# Altium PCB AIO_BLUE_TO_IDC.PcbDoc
Units mm, origin at the board's own origin, x right, y up, seen from the top; angles counter-clockwise.
Board outline 82 x 38 mm, 2 copper layers (Top Layer, Bottom Layer); 2 components, 41 nets, 124 pads, 0 vias.
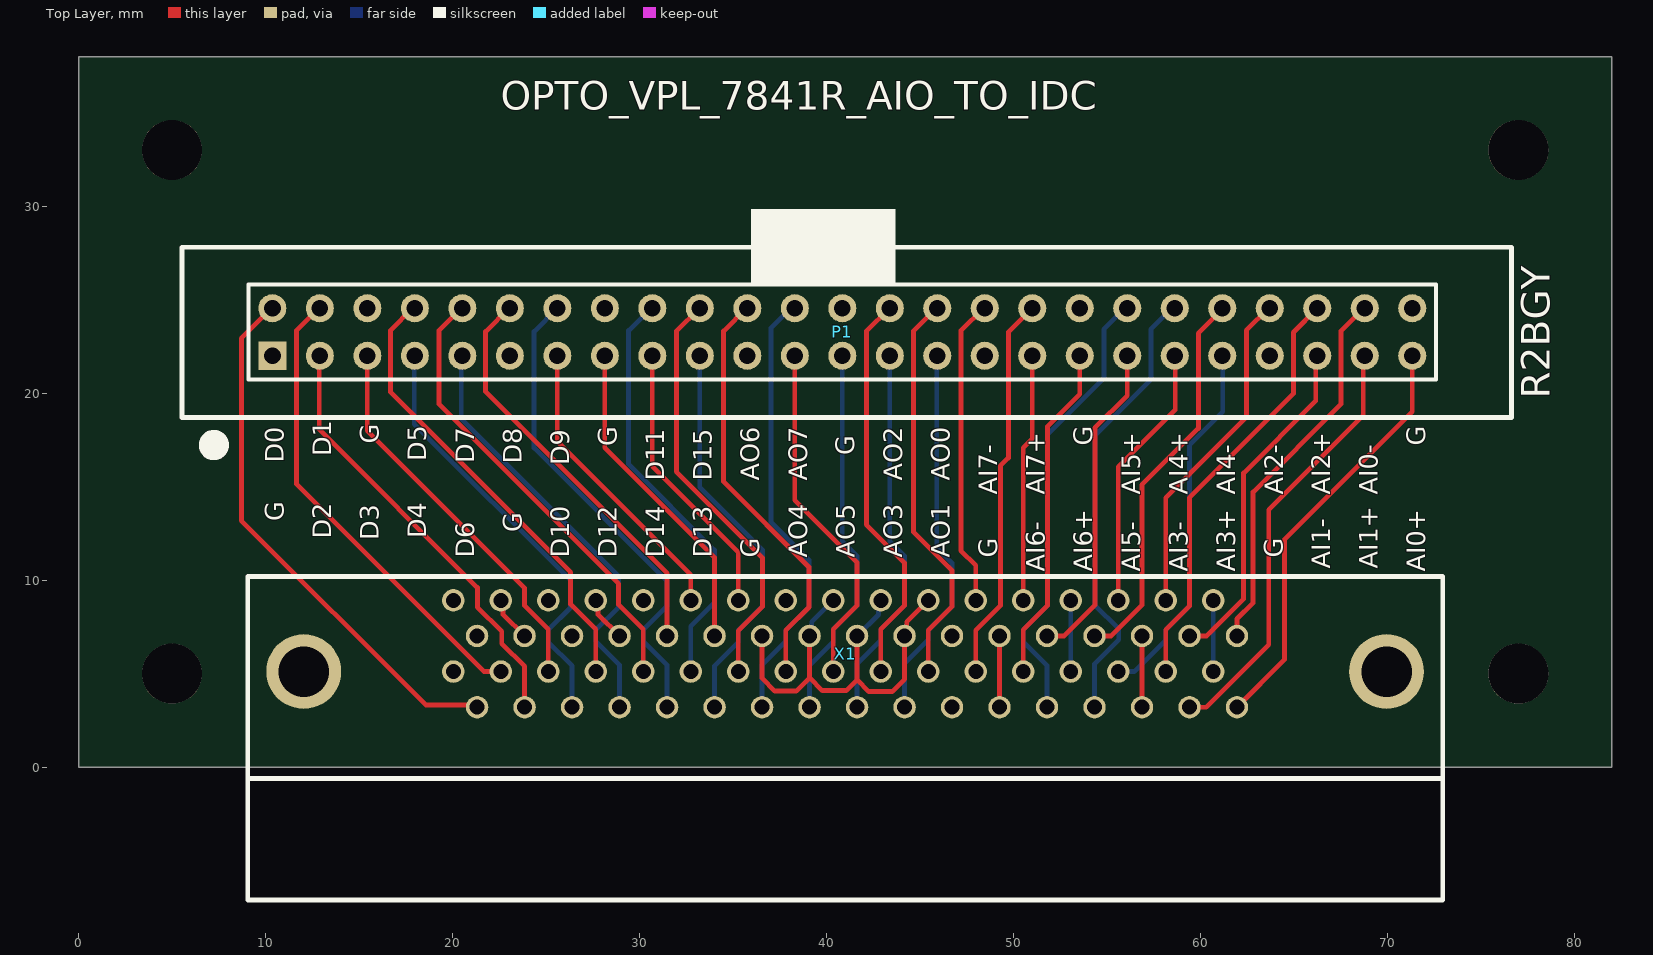
[diagram p0: Top Layer view]
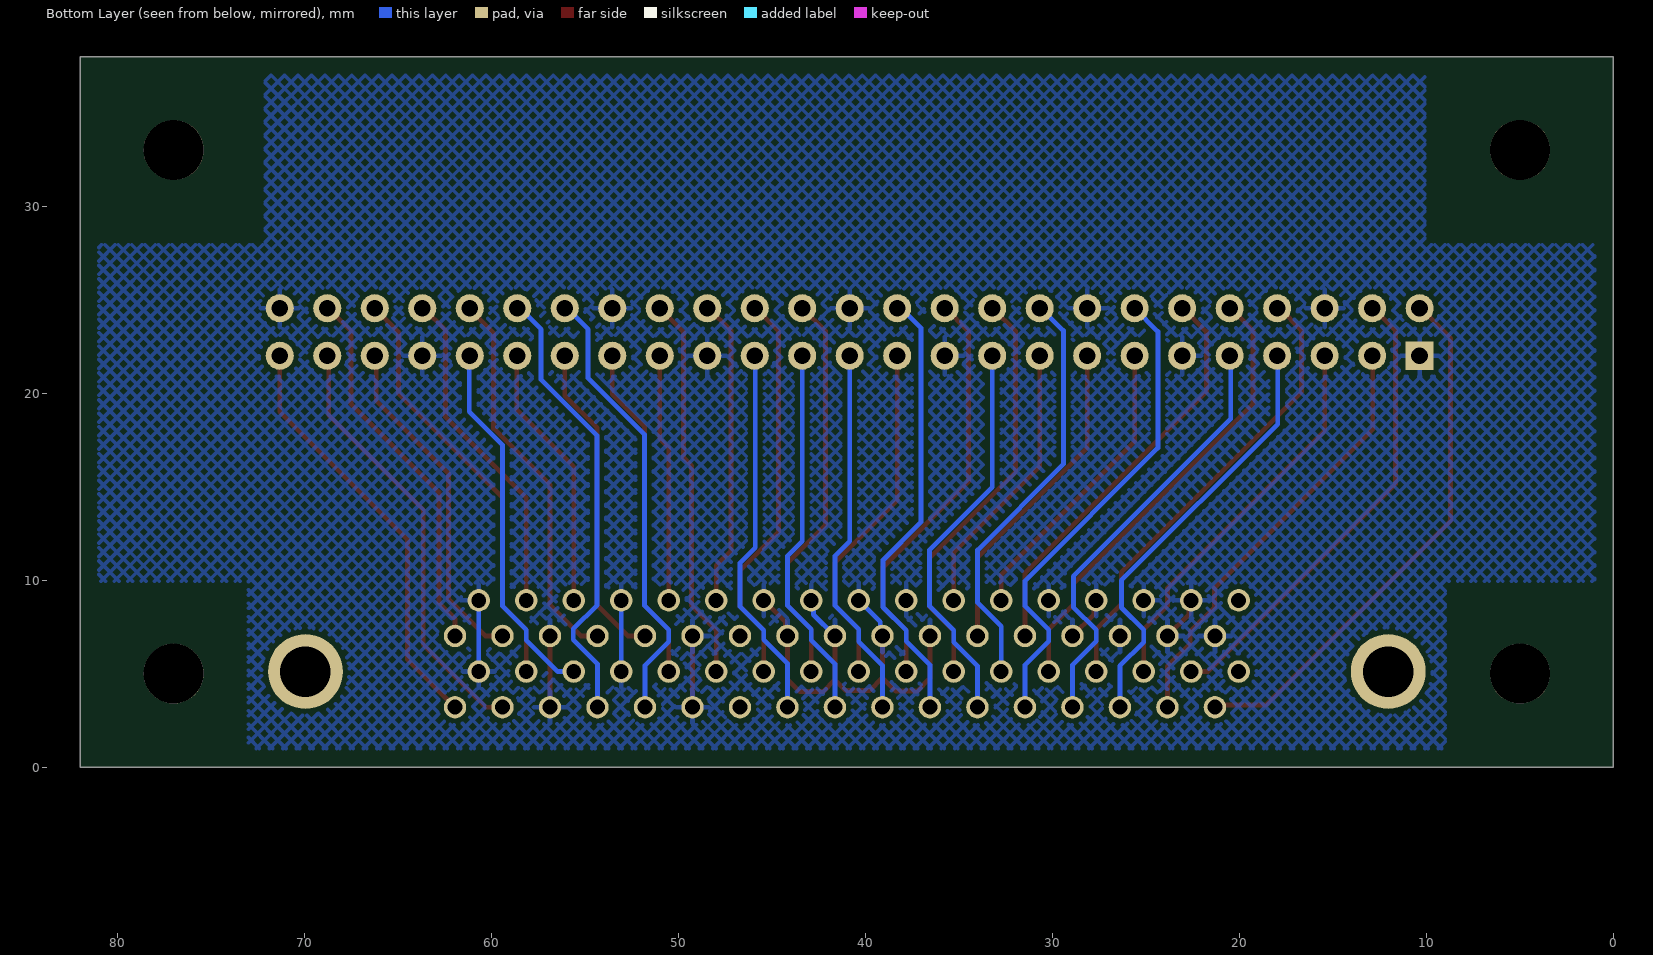
[diagram p1: Bottom Layer view, seen from below]

## Layer stack, top to bottom
Top Solder: solder mask 0.0102, Solder Resist, Dk 3.5
Top Layer: signal copper 0.0356
Dielectric 1: dielectric 0.32, FR-4, Dk 4.8
Bottom Layer: signal copper 0.0356
Bottom Solder: solder mask 0.0102, Solder Resist, Dk 3.5

## Board outline
0,0 0,38 43.5,38 82,38 82,0 75.5,0

## Design rules (kind name [scope] priority, off if disabled: settings)
Clearance [All] p1: gap=0.254 ignorepadtopadclearanceinfootprint=FALSE except(0: Arc-Hole Track-Hole SMDPad-Hole THPad-Hole Via-Hole Fill-Hole Poly-Hole Region-Hole Text-Hole)
PolygonConnect [All] p1: connectstyle=Relief reliefconductorwidth=0.254 reliefentries=4 polygonreliefangle="90 Angle" airgapwidth=0.254
RoutingVias [All] p1: holewidth=0.711 width=1.27 viastyle="Through Hole" minholewidth=0.711 minwidth=1.27 maxholewidth=0.711 maxwidth=1.27
SolderMaskExpansion [All] p1: expansion=0.102 istentingtop=FALSE
Width [All] p1: maxlimit=0.254 minlimit=0.254 preferedwidth=0.254
30 further rules are at their usual default settings.

## Components (designator, comment, footprint, x,y, rotation, side; value= is the part's Value field where it differs from the comment)
P1 "Header 25X2" HDR2X25 10.365,21.998 r0 top
X1 "CONNECTOR0_7841R" CONNECTOR0_7841R 12.044,5.107 r0 top

## Footprints (in the part's own frame and the unit in brackets; to place one, negate y for a bottom-side part, rotate by r counter-clockwise, add the part's x,y. Pads: shape width x height; smd on the part's side, far side on the other; paste and mask are expansions set on the pad)
CONNECTOR0_7841R [mm]
  round 1.2 hole 0.8: 1(8,3.81) 2(9.27,1.905) 3(10.54,3.81) 4(11.81,1.905) 5(13.08,3.81) 6(14.35,1.905) 7(15.62,3.81) 8(16.89,1.905) 9(18.16,3.81) 10(19.43,1.905) 11(20.7,3.81) 12(21.97,1.905) 13(23.24,3.81) 14(24.51,1.905) 15(25.78,3.81) 16(27.05,1.905) 17(28.32,3.81) 18(29.59,1.905) 19(30.86,3.81) 20(32.13,1.905) 21(33.4,3.81) 22(34.67,1.905) 23(35.94,3.81) 24(37.21,1.905) 25(38.48,3.81) 26(39.75,1.905) 27(41.02,3.81) 28(42.29,1.905) 29(43.56,3.81) 30(44.83,1.905) 31(46.1,3.81) 32(47.37,1.905) 33(48.64,3.81) 34(49.91,1.905) 35(8,0) 36(9.27,-1.905) 37(10.54,0) 38(11.81,-1.905) 39(13.08,0) 40(14.35,-1.905) 41(15.62,0) 42(16.89,-1.905) 43(18.16,0) 44(19.43,-1.905) 45(20.7,0) 46(21.97,-1.905) 47(23.24,0) 48(24.51,-1.905) 49(25.78,0) 50(27.05,-1.905) 51(28.32,0) 52(29.59,-1.905) 53(30.86,0) 54(32.13,-1.905) 55(33.4,0) 56(34.67,-1.905) 57(35.94,0) 58(37.21,-1.905) 59(38.48,0) 60(39.75,-1.905) 61(41.02,0) 62(42.29,-1.905) 63(43.56,0) 64(44.83,-1.905) 65(46.1,0) 66(47.37,-1.905) 67(48.64,0) 68(49.91,-1.905)
  round 4 hole 2.7: 69(57.91,0) 70(0,0)
  silkscreen extent -3,-12.22 60.91,5.08, body extent -3,-12.22 60.91,5.08, height 10.25
HDR2X25 [mm] "Connector; Header; 25x2 Position"
  rect 1.5x1.5 hole 0.9: 1(0,0)
  round 1.5 hole 0.9: 2(0,2.54) 3(2.54,0) 4(2.54,2.54) 5(5.08,0) 6(5.08,2.54) 7(7.62,0) 8(7.62,2.54) 9(10.16,0) 10(10.16,2.54) 11(12.7,0) 12(12.7,2.54) 13(15.24,0) 14(15.24,2.54) 15(17.78,0) 16(17.78,2.54) 17(20.32,0) 18(20.32,2.54) 19(22.86,0) 20(22.86,2.54) 21(25.4,0) 22(25.4,2.54) 23(27.94,0) 24(27.94,2.54) 25(30.48,0) 26(30.48,2.54) 27(33.02,0) 28(33.02,2.54) 29(35.56,0) 30(35.56,2.54) 31(38.1,0) 32(38.1,2.54) 33(40.64,0) 34(40.64,2.54) 35(43.18,0) 36(43.18,2.54) 37(45.72,0) 38(45.72,2.54) 39(48.26,0) 40(48.26,2.54) 41(50.8,0) 42(50.8,2.54) 43(53.34,0) 44(53.34,2.54) 45(55.88,0) 46(55.88,2.54) 47(58.42,0) 48(58.42,2.54) 49(60.96,0) 50(60.96,2.54)
  silkscreen extent -1.27,-1.27 62.23,3.81

## Part data
P1: "Header, 25-Pin, Dual row", LatestRevisionDate=17-Jul-2002, LatestRevisionNote="Re-released for DXP Platform.", Publisher="Altium Limited"

## Free pads (board coordinates)
  round 3.2 hole 3.2 unplated: 0(5,5) 0(5,33) 0(77,5) 0(77,33)

## Nets (pads, with @x,y where several pads share a name; then routed paths per layer and width w, separated by ;. In a path a pad name is that pad's centre, name@x,y a point inside that pad or via, vN(x,y) a via of type N, cw(c..) or ccw(c..) an arc to the next point about the centre after c; other vN are vias at no path point)
AI0+: P1.49 X1.68 | length 22.7
  Top Layer w0.254: X1.68 64.491,5.739 64.491,12.167 71.323,18.999 P1.49@71.323,21.998
AI0-: P1.48 X1.34 | length 20.4
  Top Layer w0.254: X1.34 61.954,7.921 62.814,8.781 62.814,14.707 67.513,19.406 67.513,23.317 P1.48@68.76,24.564
AI1+: P1.47 X1.66 | length 23.2
  Top Layer w0.254: X1.66 60.301,3.202 63.652,6.553 63.652,13.767 68.707,18.821 P1.47@68.707,21.998
AI1-: P1.45 X1.32 | length 18.3
  Top Layer w0.254: X1.32 60.327,7.012 62.306,8.992 62.306,15.723 66.167,19.583 P1.45@66.167,21.998
AI2+: P1.46 X1.65 | length 22.8
  Top Layer w0.254: X1.65 58.144,7.344 59.411,8.611 59.411,14.402 64.973,19.964 64.973,23.241 P1.46@66.258,24.525
AI2-: P1.44 X1.31 | length 17.9
  Top Layer w0.254: X1.31 58.144,14.405 62.459,18.72 62.459,23.368 P1.44@63.667,24.576
AI3+: P1.41 X1.63 | length 19.7
  Bottom Layer w0.254: X1.63 56.466,5.107 58.141,6.782 58.141,7.341 59.411,8.611 59.411,17.221 61.189,18.999 P1.41@61.189,21.998
AI3-: P1.39 X1.29 | length 14.3
  Top Layer w0.254: X1.29 55.604,16.056 58.649,19.101 P1.39@58.649,21.998
AI4+: P1.40 X1.62 | length 24.2
  Bottom Layer w0.254: X1.62 54.334,5.515 55.626,6.807 55.626,7.391 54.356,8.661 54.356,17.729 57.353,20.726 57.353,23.419 P1.40@58.549,24.614
AI4-: P1.42 X1.28 | length 20.9
  Top Layer w0.254: X1.28 55.221,7.012 56.871,8.661 56.871,15.088 59.893,18.11 59.893,23.19 P1.42@61.203,24.5
AI5+: P1.38 X1.60 | length 24.2
  Bottom Layer w0.254: X1.60 51.794,5.432 50.521,6.706 50.521,7.341 51.816,8.636 51.816,17.78 54.839,20.803 54.839,23.419 55.224,23.804 ; 55.22,23.809 ccw(c56.085,24.538) 55.224,23.804 ; P1.38@56.021,24.602 55.224,23.804
AI5-: P1.37 X1.26 | length 17.3
  Top Layer w0.254: X1.26 52.707,7.012 54.356,8.661 54.356,18.136 56.083,19.863 P1.37@56.083,21.998
AI6+: P1.35 X1.59 | length 18.1
  Top Layer w0.254: X1.59 50.524,7.344 51.816,8.636 51.816,18.212 53.545,19.941 P1.35
AI6-: P1.33 X1.25 | length 13.3
  Top Layer w0.254: X1.25 50.524,17.072 51.005,17.553 P1.33
AI7+: P1.34 X1.57 | length 20.7
  Top Layer w0.254: X1.57 47.984,7.319 49.301,8.636 49.301,16.104 49.733,16.535 49.733,23.266 P1.34
AI7-: P1.32 X1.23 | length 16.5
  Top Layer w0.254: X1.23 47.984,10.792 47.193,11.582 47.193,23.343 P1.32@48.427,24.576
AO0: P1.30 X1.55 | length 21.3
  Top Layer w0.254: X1.55 45.444,7.319 46.711,8.585 46.711,10.516 44.653,12.573 44.653,23.317 P1.30@45.9,24.564
AO1: P1.29 X1.54 | length 20.2
  Bottom Layer w0.254: X1.54 44.174,5.541 45.441,6.807 45.441,7.315 46.711,8.585 46.711,10.922 45.898,11.735 P1.29@45.898,21.998
AO2: P1.28 X1.53 | length 21.3
  Top Layer w0.254: X1.53 42.904,7.369 44.171,8.636 44.171,10.929 42.139,12.961 42.139,23.317 P1.28@43.372,24.551
AO3: P1.27 X1.52 | length 20.2
  Bottom Layer w0.254: X1.52 41.634,5.515 42.901,6.782 42.901,7.366 44.171,8.636 44.171,11.303 43.383,12.09 P1.27@43.383,21.998
AO4: P1.23 X1.51 | length 18.8
  Top Layer w0.254: P1.23@38.303,21.998 38.303,14.269 41.631,10.942 41.631,8.636 40.364,7.369 X1.51
AO5: P1.25 X1.50 | length 20.2
  Bottom Layer w0.254: X1.50 39.094,5.439 40.361,6.706 40.361,7.366 41.631,8.636 41.631,11.303 40.843,12.09 P1.25@40.843,21.998
AO6: P1.22 X1.49 | length 22.4
  Top Layer w0.254: P1.22@35.74,24.564 34.493,23.317 34.493,15.268 39.065,10.696 39.065,8.56 37.824,7.319 X1.49
AO7: P1.24 X1.48 | length 23.9
  Bottom Layer w0.254: X1.48 36.554,5.464 37.821,6.731 37.821,7.315 39.065,8.56 39.065,11.074 37.033,13.106 37.033,23.495 38.076,24.538 P1.24
DGND: P1.1 P1.6 P1.11 P1.16 P1.21 P1.26 P1.31 P1.36 P1.43 P1.50 X1.2 X1.3 X1.4 X1.5 X1.6 X1.7 X1.8 X1.9 X1.14 X1.15 X1.16 X1.17 X1.18 X1.19 X1.20 X1.21 X1.24 X1.27 X1.30 X1.33 X1.58 X1.61 X1.64 X1.67 | length 45.8
  Top Layer w0.254: X1.3 22.706,8.795 22.706,8.16 X1.4 ; X1.7 27.786,8.795 27.786,8.16 X1.8 ; X1.14 36.554,4.746 37.236,4.064 38.379,4.064 39.094,4.779 ; X1.16 39.094,4.779 ; X1.18 41.634,4.677 ; X1.21 44.296,7.769 44.296,7.134 X1.20 44.174,4.702 43.51,4.039 42.272,4.039 41.634,4.677 ; X1.58 X1.24 ; X1.64 X1.30 ; 39.094,4.779 39.783,4.089 41.046,4.089 41.634,4.677
  Bottom Layer w0.254: X1.16 39.216,7.134 39.216,7.769 X1.17 ; X1.18 42.782,8.16 42.782,8.795 X1.19 ; X1.61 X1.27 ; X1.67 X1.33
DIO0: P1.2 X1.36 | length 28.8
  Top Layer w0.254: P1.2@10.34,24.564 8.712,22.936 8.712,13.183 18.573,3.322 21.194,3.322 X1.36
DIO1: P1.4 X1.37 | length 25
  Top Layer w0.254: P1.4@12.867,24.576 11.659,23.368 11.659,15.138 21.69,5.107 X1.37
DIO2: P1.3 X1.38 | length 23.3
  Top Layer w0.254: P1.3@12.878,21.998 12.878,18.059 21.336,9.601 21.336,8.56 22.631,7.264 22.631,6.604 23.854,5.381 X1.38
DIO3: P1.5 X1.39 | length 20.9
  Top Layer w0.254: P1.5 15.445,17.981 23.851,9.576 23.851,8.636 25.124,7.363 X1.39
DIO4: P1.7 X1.40 | length 23.3
  Bottom Layer w0.254: P1.7@17.958,21.998 17.958,18.339 26.314,9.982 26.314,8.534 25.121,7.341 25.121,6.68 26.394,5.407 X1.40
DIO5: P1.8 X1.41 | length 24.6
  Top Layer w0.254: P1.8 17.858,24.538 16.688,23.368 16.688,20.041 26.314,10.414 26.314,8.712 27.664,7.363 X1.41
DIO6: P1.9 X1.42 | length 23.3
  Bottom Layer w0.254: P1.9@20.472,21.998 20.472,18.618 28.88,10.211 28.88,8.56 27.661,7.341 27.661,6.731 28.934,5.458 X1.42
DIO7: P1.10 X1.43 | length 24.5
  Top Layer w0.254: P1.10@20.487,24.576 19.279,23.368 19.279,19.406 28.88,9.804 28.88,8.687 30.204,7.363 X1.43
DIO8: P1.12 X1.10 | length 22.1
  Top Layer w0.254: P1.12@23.04,24.564 21.768,23.292 21.768,20.069 31.474,10.363 X1.10
DIO9: P1.14 X1.44 | length 25.9
  Bottom Layer w0.254: P1.14 24.359,23.292 24.359,17.069 31.471,9.957 31.471,8.611 30.201,7.341 30.201,6.731 31.474,5.458 X1.44
DIO10: P1.13 X1.11 | length 16
  Top Layer w0.254: P1.13@25.603,21.998 25.603,17.428 32.744,10.287 X1.11
DIO11: P1.18 X1.45 | length 22.4
  Bottom Layer w0.254: P1.18@30.647,24.576 29.413,23.343 29.413,16.205 34.011,11.608 34.011,8.788 32.744,7.522 X1.45
DIO12: P1.15 X1.12 | length 17.4
  Top Layer w0.254: P1.15@28.143,21.998 28.143,17.076 34.014,11.205 X1.12
DIO13: P1.19 X1.46 | length 21.2
  Bottom Layer w0.254: P1.19@33.223,21.998 33.223,14.964 36.576,11.612 36.576,8.611 35.281,7.315 35.281,6.68 34.014,5.414 X1.46
DIO14: P1.17 X1.13 | length 15
  Top Layer w0.254: P1.17@30.683,21.998 30.683,16.078 35.284,11.477 X1.13
DIO15: P1.20 X1.47 | length 22.4
  Top Layer w0.254: P1.20@33.212,24.551 31.979,23.317 31.979,15.799 36.576,11.201 36.576,8.585 35.284,7.293 X1.47
pads on no net: X1.1 X1.22 X1.35 X1.56 X1.69 X1.70

## Polygon pours and split planes (outlines as drawn)
DGND on Bottom Layer "Top Overlay-No Net" (hatched 45Degree grid 0.508 track 0.203, remove dead copper, pour order 0): 1,37 81,37 81,1 1,1

## Other copper
Bottom Layer:
  pour cut-out: 0.088,9.935 0.088,-0.065 9,-0.065 9,9.935
  pour cut-out: 73,9.935 73,-0.065 82.088,-0.065 82.088,9.935
  pour cut-out: 72.088,37.935 72.088,27.935 82.088,27.935 82.088,37.935
  pour cut-out: 0.088,37.935 0.088,27.935 10.088,27.935 10.088,37.935

## Silkscreen, mask and mechanical layers (free items; w line width, h text height)
Top Overlay:
  circle w0.854: c7.239,17.222 r0.381
  rectangle: 35.976,25.838 43.695,27.847
  rectangle: 35.976,27.845 43.695,29.854
  lines w0.254: 5.539,18.696 76.639,18.696 76.639,27.796 5.539,27.796 5.539,18.696
  text "OPTO_VPL_7841R_AIO_TO_IDC" at 22.587,35.154 h1.52
  text "R2BGY" at 78.689,19.686 h1.52 r90
  text "G" at 16.061,17.296 h1 r90
  text "G" at 54.225,17.195 h1 r90
  text "G" at 72.034,17.195 h1 r90
  text "G" at 28.782,17.169 h1 r90
  text "G" at 41.478,16.688 h1 r90
  text "D1" at 13.517,16.611 h1 r90
  text "D5" at 18.605,16.357 h1 r90
  text "D0" at 10.973,16.281 h1 r90
  text "D7" at 21.15,16.255 h1 r90
  text "D8" at 23.694,16.23 h1 r90
  text "D9" at 26.238,16.154 h1 r90
  text "D11" at 31.327,15.316 h1 r90
  text "D15" at 33.871,15.316 h1 r90
  text "AO6" at 36.415,15.316 h1 r90
  text "AO7" at 38.959,15.316 h1 r90
  text "AO2" at 44.048,15.316 h1 r90
  text "AO0" at 46.592,15.316 h1 r90
  text "AI7-" at 49.136,14.565 h1 r90
  text "AI7+" at 51.681,14.565 h1 r90
  text "AI5+" at 56.769,14.565 h1 r90
  text "AI4+" at 59.313,14.565 h1 r90
  text "AI4-" at 61.857,14.565 h1 r90
  text "AI2-" at 64.414,14.565 h1 r90
  text "AI2+" at 66.946,14.565 h1 r90
  text "AI0-" at 69.49,14.565 h1 r90
  text "G" at 10.973,13.157 h1 r90
  text "G" at 23.694,12.548 h1 r90
  text "D4" at 18.605,12.243 h1 r90
  text "D2" at 13.517,12.217 h1 r90
  text "D3" at 16.061,12.141 h1 r90
  text "D6" at 21.15,11.202 h1 r90
  text "D10" at 26.238,11.202 h1 r90
  text "D12" at 28.782,11.202 h1 r90
  text "D14" at 31.327,11.202 h1 r90
  text "D13" at 33.871,11.202 h1 r90
  text "G" at 36.415,11.202 h1 r90
  text "AO4" at 38.959,11.202 h1 r90
  text "AO5" at 41.504,11.202 h1 r90
  text "AO3" at 44.048,11.202 h1 r90
  text "AO1" at 46.592,11.202 h1 r90
  text "G" at 49.136,11.202 h1 r90
  text "G" at 64.402,11.202 h1 r90
  text "AI1-" at 66.946,10.617 h1 r90
  text "AI1+" at 69.49,10.617 h1 r90
  text "AI6-" at 51.681,10.451 h1 r90
  text "AI6+" at 54.225,10.451 h1 r90
  text "AI5-" at 56.769,10.451 h1 r90
  text "AI3-" at 59.313,10.451 h1 r90
  text "AI3+" at 61.857,10.451 h1 r90
  text "AI0+" at 72.034,10.451 h1 r90
Mechanical 1:
  lines w0.254: 0,0 82,0 82,38 0,38 0,18 0,0